# Altium PCB NexieTube rev.2.PcbDoc
Units mm, origin at the board's own origin, x right, y up, seen from the top; angles counter-clockwise.
Board outline 80 x 46 mm, 3 copper layers (Top Layer, Signal Layer 1, Bottom Layer), stack 0.488 mm thick; 29 components, 73 nets, 196 pads, 20 vias.
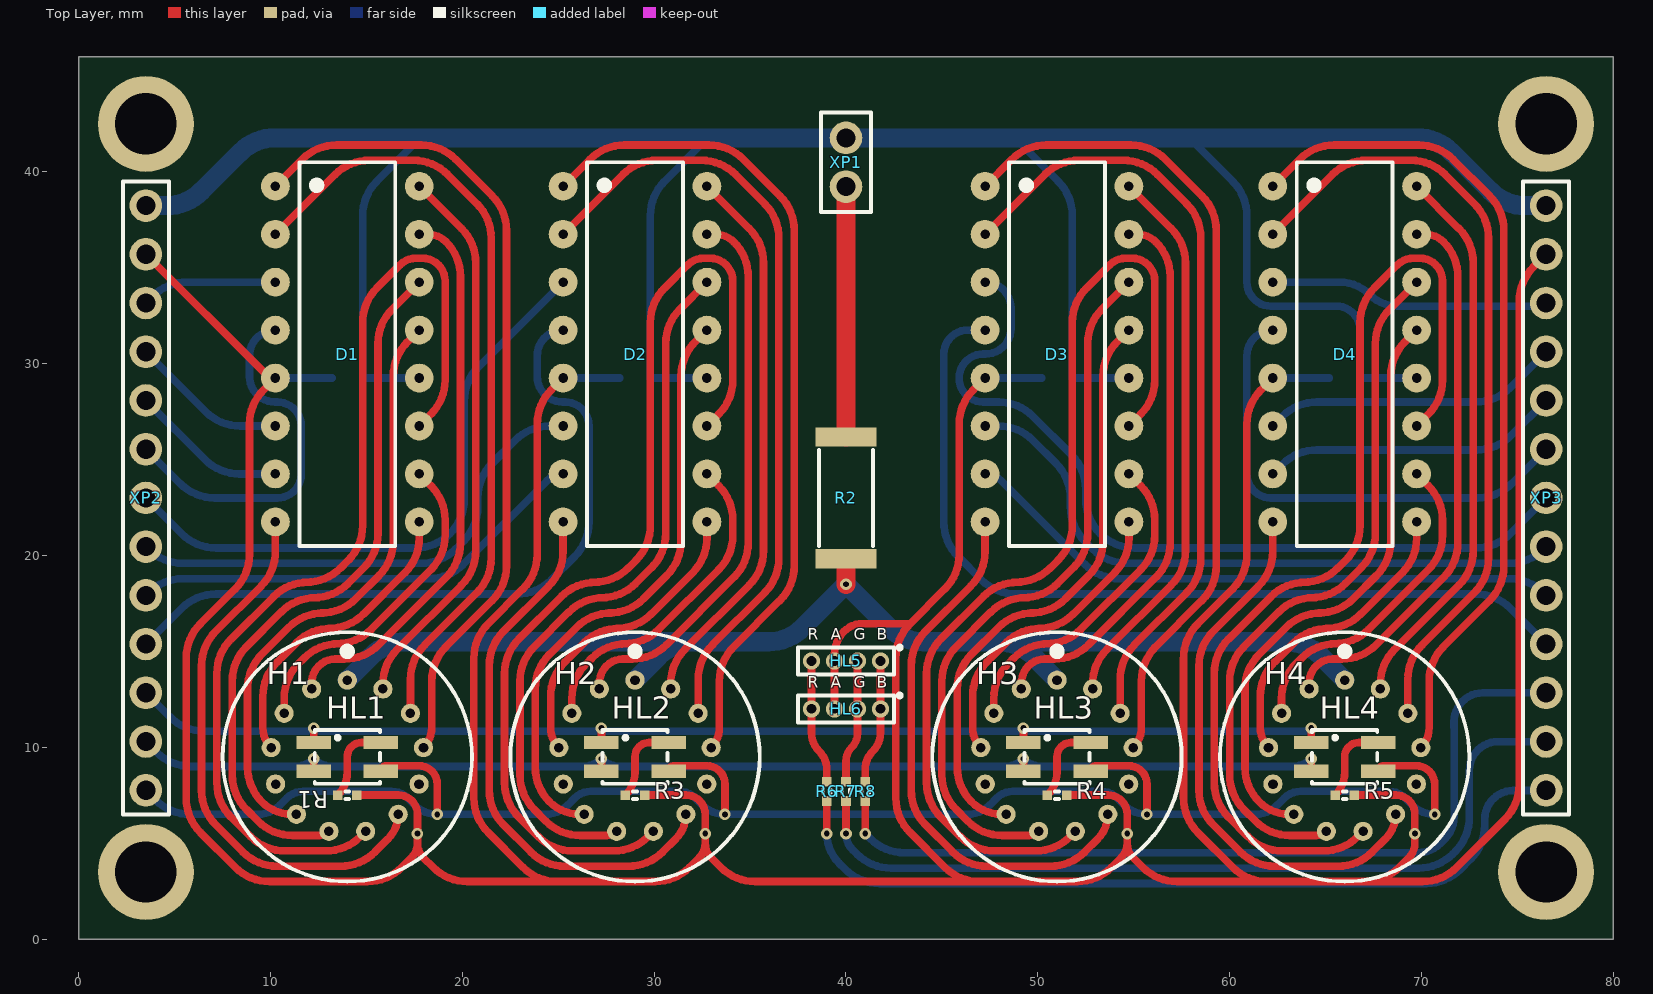
[diagram p0: Top Layer view]
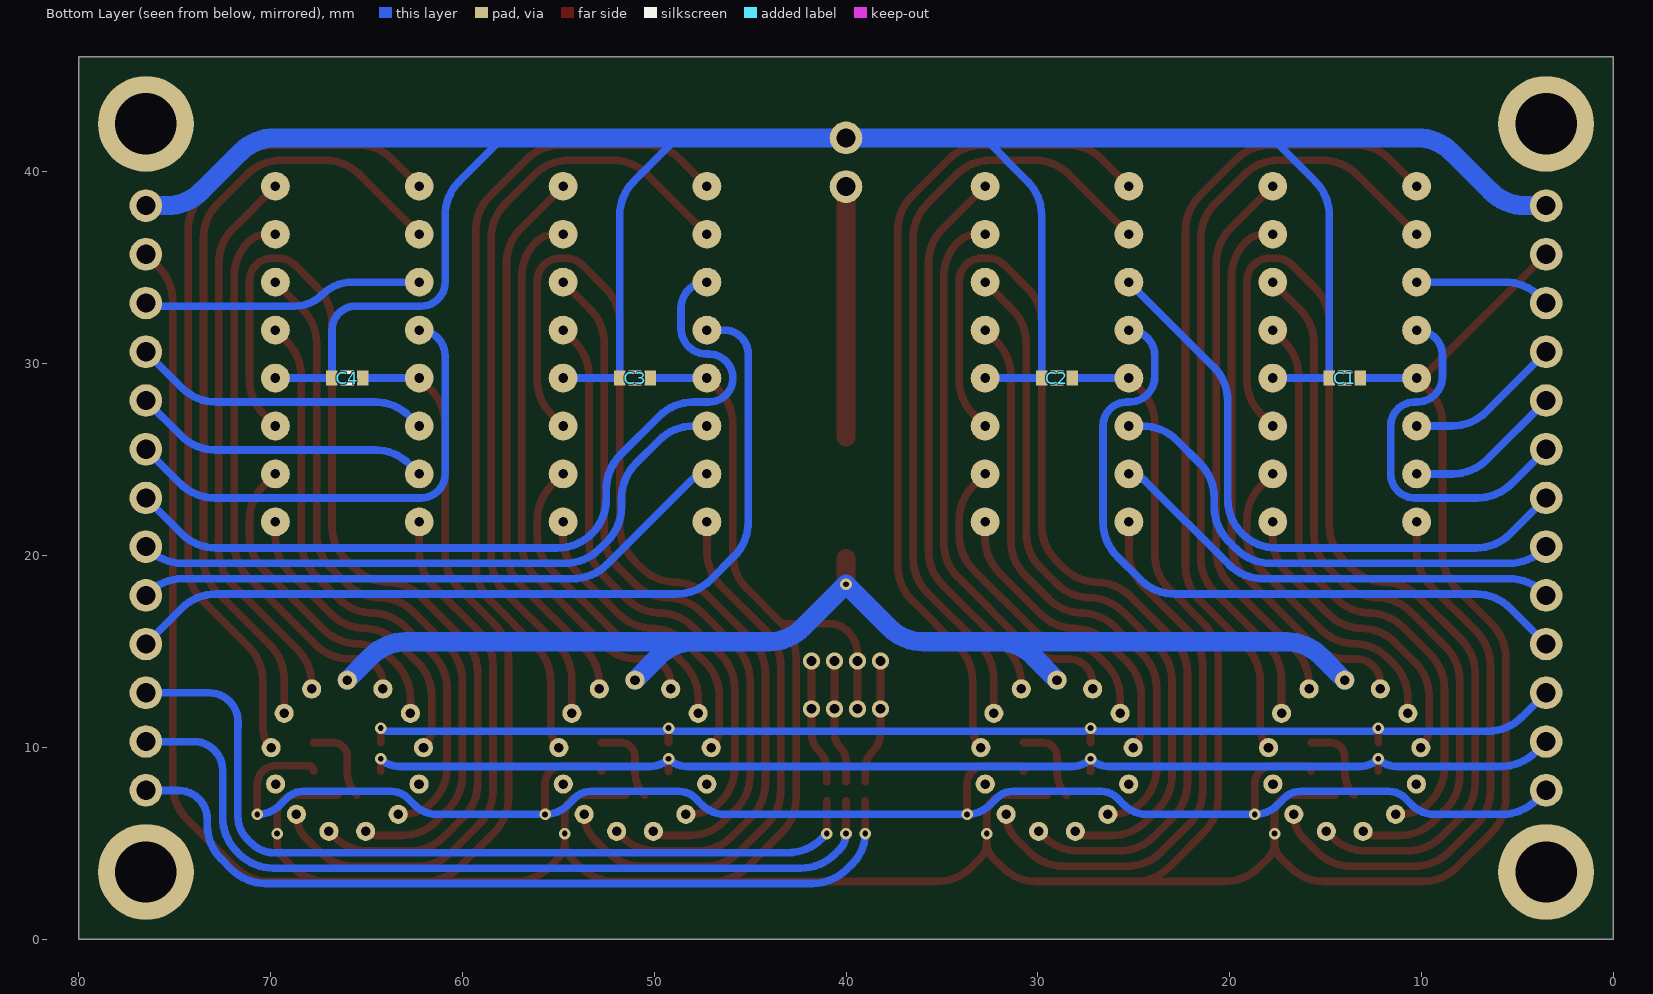
[diagram p1: Bottom Layer view, seen from below]

## Layer stack, top to bottom
Top Solder: solder mask 0.0102, Solder Resist, Dk 3.5
Top Layer: signal copper 0.0356
Dielectric 1: core 0.254, FR-4, Dk 4.2
Signal Layer 1: signal copper 0.036
Dielectric 2: prepreg 0.127, Dk 4.2
Bottom Layer: signal copper 0.0356
Bottom Solder: solder mask 0.0102, Solder Resist, Dk 3.5

## Board outline
0,0 80,0 80,46 0,46

## Design rules (kind name [scope] priority, off if disabled: settings)
Clearance [All] p1: gap=0.15 ignorepadtopadclearanceinfootprint=FALSE
ComponentClearance [All] p1: gap=0 collisioncheckmode=3 verticalgap=0 showdistances=FALSE
Height [All] p1: minheight=0 maxheight=100 prefheight=20
PolygonConnect [All] p1: connectstyle=Relief reliefconductorwidth=0.254 reliefentries=4 polygonreliefangle="90 Angle" airgapwidth=0.254
RoutingCorners [All] p1: cornerstyle=Round minsetback=1 maxsetback=1
RoutingVias [All] p1: holewidth=0.3 width=0.6 viastyle="Through Hole" minholewidth=0.3 minwidth=0.6 maxholewidth=3.2 maxwidth=5
SolderMaskExpansion [All] p1: expansion=0.1
Width [All] p1: maxlimit=1.5 minlimit=0.15 preferedwidth=0.2
27 further rules are at their usual default settings.

## Components (designator, comment, footprint, x,y, rotation, side; value= is the part's Value field where it differs from the comment)
C1 "Capacitors" SMD_0603 14,29.25 r180 bottom value="0.1 мк"
C2 "Capacitors" SMD_0603 29,29.25 r180 bottom value="0.1 мк"
C3 "Capacitors" SMD_0603 51,29.25 r180 bottom value="0.1 мк"
C4 "Capacitors" SMD_0603 66,29.25 r180 bottom value="0.1 мк"
D1 "К155ИД1" К155ИД1 14,30.5 r270 top locked
D2 "К155ИД1" К155ИД1 29,30.5 r270 top locked
D3 "К155ИД1" К155ИД1 51,30.5 r270 top locked
D4 "К155ИД1" К155ИД1 66,30.5 r270 top locked
H1 "IN-16" IN_16_tube 14,9.5 r0 top locked
H2 "IN-16" IN_16_tube 29,9.5 r0 top locked
H3 "IN-16" IN_16_tube 51,9.5 r0 top locked
H4 "IN-16" IN_16_tube 66,9.5 r0 top locked
HL1 "TO-3228BC-MRPBFGF" TO-3228BC-MRPBFGF 14,9.5 r0 top locked
HL2 "TO-3228BC-MRPBFGF" TO-3228BC-MRPBFGF 29,9.5 r0 top locked
HL3 "TO-3228BC-MRPBFGF" TO-3228BC-MRPBFGF 51,9.5 r0 top locked
HL4 "TO-3228BC-MRPBFGF" TO-3228BC-MRPBFGF 66,9.5 r0 top locked
HL5 "BL-L515RGBC" BL-L515RGBC 40,14.5 r0 top
HL6 "BL-L515RGBC" BL-L515RGBC 40,12 r0 top
R1 "Resistor" SMD_0402 14,7.5 r180 top value=510
R2 "Resistor" SMD_2512 40,23 r270 top value="15 к"
R3 "Resistor" SMD_0402 29,7.5 r180 top value=510
R4 "Resistor" SMD_0402 51,7.5 r180 top value=510
R5 "Resistor" SMD_0402 66,7.5 r180 top value=510
R6 "Resistor" SMD_0402 39,7.7 r270 top value=510
R7 "Resistor" SMD_0402 40,7.7 r270 top value=510
R8 "Resistor" SMD_0402 41,7.7 r270 top value=510
XP1 "DS1021-1*2SF11" DS1021-1*2 40,40.5 r90 top
XP2 "DS1021-1*13SF11" DS1021-1*13 3.5,23 r270 top
XP3 "DS1021-1*13SF11" DS1021-1*13 76.5,23 r270 top

## Footprints (in the part's own frame and the unit in brackets; to place one, negate y for a bottom-side part, rotate by r counter-clockwise, add the part's x,y. Pads: shape width x height; smd on the part's side, far side on the other; paste and mask are expansions set on the pad)
BL-L515RGBC [mm]
  round 0.9 hole 0.5: 1(1.8,0) 2(0.6,0) 3(-0.6,0) 4(-1.8,0)
  silkscreen extent -2.5,-0.7 2.9,0.8, body extent -2.95,-2.95 2.95,2.95, height 12.6
DS1021-1*2 [mm]
  round 1.7 hole 1: 1(-1.27,0) 2(1.27,0)
  silkscreen extent -2.6,-1.3 2.6,1.3, body extent -2.54,-1.27 2.54,1.27, height 8.44
DS1021-1*13 [mm]
  round 1.7 hole 1: 1(-15.24,0) 2(-12.7,0) 3(-10.16,0) 4(-7.62,0) 5(-5.08,0) 6(-2.54,0) 7(0,0) 8(2.54,0) 9(5.08,0) 10(7.62,0) 11(10.16,0) 12(12.7,0) 13(15.24,0)
  silkscreen extent -16.5,-1.2 16.5,1.2, body extent -16.51,-1.27 16.51,1.27, height 8.44
IN_16_tube [mm]
  round 1 hole 0.5: 1(0,4) 2(-1.859,3.542) 3(-3.292,2.272) 4(-3.971,0.482) 5(-3.74,-1.418) 6(-2.652,-2.994) 7(-0.957,-3.884) 8(0.957,-3.884) 9(2.652,-2.994) 10(3.74,-1.418) 11(3.971,0.482) 12(3.292,2.272) 13(1.859,3.542)
  Top Layer region: 0,0 0,0 0,0 0,0
  silkscreen extent -6.5,-6.5 6.5,6.5, body extent -6.75,-6.75 6.75,6.75, height 43
SMD_0402 [mm]
  rect 0.5x0.5 smd: 1(-0.5,0) 2(0.5,0)
  silkscreen extent -0.1,-0.2 0.1,0.2, body extent -0.5,-0.25 0.5,0.25, height 0.35
SMD_0603 [mm]
  rect 0.6x0.8 smd: 1(-0.8,0) 2(0.8,0)
  silkscreen extent -0.3,-0.3 0.3,0.3, body extent -0.8,-0.4 0.8,0.4, height 0.6
SMD_2512 [mm]
  rect 1x3.2 smd: 1(-3.175,0) 2(3.175,0)
  silkscreen extent -2.5,-1.4 2.5,1.4, body extent -3.17,-1.6 3.18,1.6, height 0.55
TO-3228BC-MRPBFGF [mm]
  rect 1.8x0.7 smd: 1(-1.75,0.75) 2(-1.75,-0.75) 3(1.75,-0.75) 4(1.75,0.75)
  silkscreen extent -1.7,-1.4 1.7,1.4, body extent -1.75,-1.4 1.75,1.4, height 2.05
К155ИД1 [mm]
  round 1.5 hole 0.5: 1(-8.75,-3.75) 2(-6.25,-3.75) 3(-3.75,-3.75) 4(-1.25,-3.75) 5(1.25,-3.75) 6(3.75,-3.75) 7(6.25,-3.75) 8(8.75,-3.75) 9(8.75,3.75) 10(6.25,3.75) 11(3.75,3.75) 12(1.25,3.75) 13(-1.25,3.75) 14(-3.75,3.75) 15(-6.25,3.75) 16(-8.75,3.75)
  silkscreen extent -10,-2.5 10,2.5, body extent -10.75,-3.9 10.75,3.9, height 5.31

## Part data
H1 H2 H3 H4: Manufacturer=СССР, ESKD=ИН-16
HL1 HL2 HL3 HL4: Manufacturer="Taiwan Oasis Technology Co., Ltd", Class=LED, Creator=FedorenkoS, ESKD=TO-3228BC-MRPBFGF
HL5 HL6: Manufacturer=Betlux, Class=LED, Creator=FedorenkoS, ESKD=BL-L515RGBC
XP2 XP3: "PLS", ЕСКД=DS1021-1*13SF11, Производитель=Connfly, Разработчик библиотеки="Федоренко С.С."
C1 C2 C3 C4 R1 R2 R3 R4 R5 R6 R7 R8: Creator=PavelR
XP1: ЕСКД=DS1021-1*2SF11, Производитель=Connfly, Разработчик библиотеки="Федоренко С.С."

## Free pads (board coordinates)
  round 5 hole 3.2: 0(3.5,3.5) 0(3.5,42.5) 0(76.5,3.5) 0(76.5,42.5)

## Via types
v1: diameter 0.6, hole 0.3, Top Layer to Bottom Layer, tented both sides, 20 vias

## Nets (pads, with @x,y where several pads share a name; then routed paths per layer and width w, separated by ;. In a path a pad name is that pad's centre, name@x,y a point inside that pad or via, vN(x,y) a via of type N, cw(c..) or ccw(c..) an arc to the next point about the centre after c; other vN are vias at no path point)
+5: C1.2 C2.2 C3.2 C4.2 D1.5 D2.5 D3.5 D4.5 HL5.3 HL6.3 R1.1 R3.1 R4.1 R5.1 XP2.2 XP3.2 | length 275
  Top Layer w0.4: XP2.2 9.738,29.462 ccw(c10.25,29.974) D1.5 9.644,28.644 ccw(c11.44,26.848) 8.9,26.848 8.9,20.052 cw(c6.36,20.052) 8.156,18.256 6.344,16.444 ccw(c8.14,14.648) 5.6,14.648 5.6,7.352 ccw(c8.14,7.352) 6.344,5.556 8.156,3.744 ccw(c9.952,5.54) 9.952,3 15.048,3 ccw(c15.048,5.54) 16.844,3.744 17.346,4.246 ccw(c16.593,5) 17.658,5 ; R1.1 14.5,7.512 16.652,7.512 cw(c16.652,6.506) 17.658,6.506 17.658,5 ; 24.952,3 cw(c24.952,5.54) 23.156,3.744 21.344,5.556 cw(c23.14,7.352) 20.6,7.352 20.6,14.648 cw(c23.14,14.648) 21.344,16.444 23.156,18.256 ccw(c21.36,20.052) 23.9,20.052 23.9,26.848 cw(c26.44,26.848) 24.644,28.644 D2.5 ; R3.1 29.5,7.512 31.652,7.512 cw(c31.652,6.506) 32.658,6.506 32.658,5 ; HL6.3 HL5.3 39.4,14.837 cw(c41.107,14.837) 39.9,16.044 cw(c40.866,15.078) 40.866,16.444 43.344,16.444 ; 46.952,3 cw(c46.952,5.54) 45.156,3.744 43.344,5.556 cw(c45.14,7.352) 42.6,7.352 42.6,14.648 cw(c45.14,14.648) 43.344,16.444 ; D3.5 46.644,28.644 ccw(c48.44,26.848) 45.9,26.848 45.9,20.052 cw(c43.36,20.052) 45.156,18.256 43.344,16.444 ; R4.1 51.5,7.512 53.652,7.512 cw(c53.652,6.506) 54.658,6.506 54.658,5 ; D4.5 61.644,28.644 ccw(c63.44,26.848) 60.9,26.848 60.9,20.052 cw(c58.36,20.052) 60.156,18.256 58.344,16.444 ccw(c60.14,14.648) 57.6,14.648 57.6,7.352 ccw(c60.14,7.352) 58.344,5.556 60.156,3.744 ccw(c61.952,5.54) 61.952,3 ; R5.1 66.5,7.512 68.652,7.512 cw(c68.652,6.506) 69.658,6.506 69.658,5 cw(c68.593,5) 69.346,4.246 68.844,3.744 cw(c67.048,5.54) 67.048,3 ; XP3.2 75.844,35.044 ccw(c77.64,33.248) 75.1,33.248 75.1,8.052 cw(c72.56,8.052) 74.356,6.256 71.844,3.744 cw(c70.048,5.54) 70.048,3 67.048,3 ; 17.658,5 ccw(c18.724,5) 17.971,4.246 18.473,3.744 ccw(c20.269,5.54) 20.269,3 30.048,3 ccw(c30.048,5.54) 31.844,3.744 32.346,4.246 ccw(c31.593,5) 32.658,5 ; 32.658,5 ccw(c33.724,5) 32.971,4.246 33.473,3.744 ccw(c35.269,5.54) 35.269,3 52.048,3 ccw(c52.048,5.54) 53.844,3.744 54.346,4.246 ccw(c53.593,5) 54.658,5 ; 54.658,5 ccw(c55.724,5) 54.971,4.246 55.473,3.744 ccw(c57.269,5.54) 57.269,3 61.952,3 ; 61.952,3 67.048,3
  Bottom Layer w0.4: D1.5 C1.2 ; D2.5 C2.2 ; D3.5 C3.2 ; D4.5 C4.2
  other v1: 17.658,5.5 32.658,5.5 54.658,5.5 69.658,5.5
+180: R2.1 XP1.1 | length 13.1
  Top Layer w1: R2.1 XP1.1
GND: C1.1 C2.1 C3.1 C4.1 D1.12 D2.12 D3.12 D4.12 XP1.2 XP2.1 XP3.1 | length 146.7
  Bottom Layer w0.4: D1.12 C1.1 14.8,37.718 cw(c17.34,37.718) 15.544,39.514 17.8,41.77 ; D2.12 C2.1 29.8,37.718 cw(c32.34,37.718) 30.544,39.514 32.8,41.77 ; 48.8,41.77 51.056,39.514 cw(c49.26,37.718) 51.8,37.718 C3.1 D3.12 ; 57.9,41.77 60.156,39.514 cw(c58.36,37.718) 60.9,37.718 60.9,34.25 ccw(c62.15,34.25) 62.15,33 65.55,33 cw(c65.55,31.75) 66.8,31.75 C4.1 D4.12
  Bottom Layer w1: XP2.1 4.588,38.24 ccw(c4.588,40.78) 6.384,38.984 8.426,41.026 cw(c10.222,39.23) 10.222,41.77 XP1.2 48.8,41.77 69.778,41.77 cw(c69.778,39.23) 71.574,41.026 73.616,38.984 ccw(c75.412,40.78) 75.412,38.24 XP3.1
LED_B: HL1.3 HL2.3 HL3.3 HL4.3 XP2.13 | length 91.5
  Top Layer w0.4: HL1.3 cw(c16.032,8.75) 16.032,9.032 17.74,9.032 cw(c17.74,8.082) 18.69,8.082 v1(18.69,6.5) ; HL2.3 cw(c31.032,8.75) 31.032,9.032 32.74,9.032 cw(c32.74,8.082) 33.69,8.082 v1(33.69,6.5) ; HL3.3 cw(c53.032,8.75) 53.032,9.032 54.74,9.032 cw(c54.74,8.082) 55.69,8.082 v1(55.69,6.5) ; HL4.3 cw(c68.032,8.75) 68.032,9.032 69.74,9.032 cw(c69.74,8.082) 70.69,8.082 v1(70.69,6.5)
  Bottom Layer w0.4: XP2.13 4.016,7.244 ccw(c5.812,9.04) 5.812,6.5 9.31,6.5 ccw(c9.31,8.166) 10.488,6.988 10.846,7.346 cw(c11.7,6.493) 11.7,7.7 16.3,7.7 cw(c16.3,6.493) 17.154,7.346 17.512,6.988 ccw(c18.69,8.166) v1(18.69,6.5) 24.31,6.5 ccw(c24.31,8.166) 25.488,6.988 25.846,7.346 cw(c26.7,6.493) 26.7,7.7 31.3,7.7 cw(c31.3,6.493) 32.154,7.346 32.512,6.988 ccw(c33.69,8.166) v1(33.69,6.5) 46.31,6.5 ccw(c46.31,8.166) 47.488,6.988 47.846,7.346 cw(c48.7,6.493) 48.7,7.7 53.3,7.7 cw(c53.3,6.493) 54.154,7.346 54.512,6.988 ccw(c55.69,8.166) v1(55.69,6.5) 61.31,6.5 ccw(c61.31,8.166) 62.488,6.988 62.846,7.346 cw(c63.7,6.493) 63.7,7.7 68.3,7.7 cw(c68.3,6.493) 69.154,7.346 69.512,6.988 ccw(c70.69,8.166) v1(70.69,6.5)
LED_G: HL1.2 HL2.2 HL3.2 HL4.2 XP2.12 | length 64.5
  Top Layer w0.4: HL1.2 v1(12.25,9.4) ; HL2.2 v1(27.25,9.4) ; HL3.2 v1(49.25,9.4) ; HL4.2 v1(64.25,9.4)
  Bottom Layer w0.4: XP2.12 4.056,9.744 ccw(c5.852,11.54) 5.852,9 11.284,9 ccw(c11.284,10.366) v1(12.25,9.4) ccw(c13.216,10.366) 13.216,9 26.284,9 ccw(c26.284,10.366) v1(27.25,9.4) ccw(c28.216,10.366) 28.216,9 48.284,9 ccw(c48.284,10.366) v1(49.25,9.4) ccw(c50.216,10.366) 50.216,9 63.284,9 ccw(c63.284,10.366) v1(64.25,9.4)
LED_P_B: R8.2 XP3.11 | length 44.4
  Top Layer w0.4: v1(41,5.5) R8.2
  Bottom Layer w0.4: v1(41,5.5) 41.256,5.244 ccw(c43.052,7.04) 43.052,4.5 69.8,4.5 ccw(c69.8,6.207) 71.007,5 71.207,5.2 ccw(c70,6.407) 71.707,6.407 71.707,11.04 71.7,11.04 71.7,11.336 cw(c73.2,11.336) 73.2,12.836 76.5,12.836 XP3.11
LED_P_G: R7.2 XP3.12 | length 43.9
  Top Layer w0.4: v1(40,5.5) R7.2
  Bottom Layer w0.4: v1(40,5.5) ccw(c41.207,5.5) 40.353,4.647 40.556,4.444 ccw(c42.352,6.24) 42.352,3.7 69.848,3.7 ccw(c69.848,6.24) 71.644,4.444 71.756,4.556 ccw(c69.96,6.352) 72.5,6.352 72.5,8.5 72.5,8.796 cw(c74,8.796) 74,10.296 76.5,10.296 XP3.12
LED_P_R: R6.2 XP3.13 | length 43.4
  Top Layer w0.4: v1(39,5.5) R6.2
  Bottom Layer w0.4: v1(39,5.5) ccw(c41.173,5.5) 39.636,3.964 39.956,3.644 ccw(c41.752,5.44) 41.752,2.9 70.248,2.9 ccw(c70.248,5.44) 72.044,3.644 72.556,4.156 ccw(c70.76,5.952) 73.3,5.952 73.3,6.248 cw(c74.8,6.248) 74.8,7.748 76.5,7.748 XP3.13
LED_R: HL1.1 HL2.1 HL3.1 HL4.1 XP2.11 | length 64.8
  Top Layer w0.4: HL1.1 v1(12.25,11) ; HL2.1 v1(27.25,11) ; HL3.1 v1(49.25,11) ; HL4.1 v1(64.25,11)
  Bottom Layer w0.4: XP2.11 4.764,11.576 ccw(c6.56,13.372) 6.56,10.832 11.845,10.832 ccw(c11.845,11.405) v1(12.25,11) ccw(c12.655,11.405) 12.655,10.832 26.845,10.832 ccw(c26.845,11.405) v1(27.25,11) ccw(c27.655,11.405) 27.655,10.832 48.845,10.832 ccw(c48.845,11.405) v1(49.25,11) ccw(c49.655,11.405) 49.655,10.832 63.845,10.832 ccw(c63.845,11.405) v1(64.25,11)
NetD1_1: D1.1 H1.11 | length 43.6
  Top Layer w0.4: D1.1 11.656,40.656 cw(c13.452,38.86) 13.452,41.4 17.848,41.4 cw(c17.848,38.86) 19.644,40.656 21.556,38.744 cw(c19.76,36.948) 22.3,36.948 22.3,19.452 cw(c19.76,19.452) 21.556,17.656 19.144,15.244 ccw(c20.94,13.448) 18.4,13.448 18.4,11.018 cw(c16.935,11.018) H1.11
NetD1_2: D1.2 H1.12 | length 41.1
  Top Layer w0.4: D1.2 13.356,39.856 cw(c15.152,38.06) 15.152,40.6 17.448,40.6 cw(c17.448,38.06) 19.244,39.856 20.756,38.344 cw(c18.96,36.548) 21.5,36.548 21.5,19.852 cw(c18.96,19.852) 20.756,18.056 18.036,15.336 ccw(c19.832,13.54) 17.292,13.54 H1.12
NetD1_8: D1.8 H1.9 | length 29
  Top Layer w0.4: D1.8 10.25,20.202 cw(c7.71,20.202) 9.506,18.406 7.144,16.044 ccw(c8.94,14.248) 6.4,14.248 6.4,7.752 ccw(c8.94,7.752) 7.144,5.956 8.556,4.544 ccw(c10.352,6.34) 10.352,3.8 13.648,3.8 ccw(c13.648,6.34) 15.444,4.544 16.12,5.22 ccw(c14.833,6.506) H1.9
NetD1_9: D1.9 H1.4 | length 16.1
  Top Layer w0.4: H1.4 cw(c11.065,11.018) 9.6,11.018 9.6,12.648 cw(c12.14,12.648) 10.344,14.444 11.356,15.456 cw(c13.152,13.66) 13.152,16.2 ; 13.048,16.2 ccw(c13.048,18.74) 14.844,16.944 17.006,19.106 ccw(c15.21,20.902) 17.75,20.902 D1.9
NetD1_10: D1.10 H1.3 | length 17.2
  Top Layer w0.4: H1.3 10.708,12.556 cw(c13.248,12.556) 11.452,14.352 11.756,14.656 cw(c13.552,12.86) 13.552,15.4 ; 13.448,15.4 ccw(c13.448,17.94) 15.244,16.144 18.356,19.256 ccw(c16.56,21.052) 19.1,21.052 19.1,21.848 ccw(c16.56,21.848) 18.356,23.644 D1.10
NetD1_11: D1.11 H1.8 | length 52.8
  Top Layer w0.4: 11.848,18.6 ccw(c11.848,21.14) 13.644,19.344 14.056,19.756 ccw(c12.26,21.552) 14.8,21.552 14.8,32.148 cw(c17.34,32.148) 15.544,33.944 16.746,35.146 cw(c17.6,34.293) 17.6,35.5 17.9,35.5 cw(c17.9,34.293) 18.754,35.146 ; 11.952,18.6 ccw(c11.952,16.06) 10.156,17.856 7.944,15.644 ccw(c9.74,13.848) 7.2,13.848 7.2,8.152 ccw(c9.74,8.152) 7.944,6.356 8.956,5.344 ccw(c10.752,7.14) 10.752,4.6 12.889,4.6 ccw(c12.889,7.14) 14.685,5.344 H1.8 ; D1.11 18.356,27.356 ccw(c16.56,29.152) 19.1,29.152 19.1,34.3 ccw(c17.893,34.3) 18.746,35.154
NetD1_13: D1.13 H1.6 | length 31.2
  Top Layer w0.4: H1.6 11.113,6.506 cw(c11.113,8.726) 9.544,7.156 cw(c11.34,8.952) 8.8,8.952 8.8,13.048 cw(c11.34,13.048) 9.544,14.844 10.956,16.256 cw(c12.752,14.46) 12.752,17 ; 12.648,17 ccw(c12.648,19.54) 14.444,17.744 15.656,18.956 ccw(c13.86,20.752) 16.4,20.752 16.4,29.348 cw(c18.94,29.348) 17.144,31.144 D1.13
NetD1_14: D1.14 H1.7 | length 37.3
  Top Layer w0.4: 12.248,17.8 ccw(c12.248,20.34) 14.044,18.544 14.856,19.356 ccw(c13.06,21.152) 15.6,21.152 15.6,31.048 cw(c18.14,31.048) 16.344,32.844 D1.14 ; 12.352,17.8 ccw(c12.352,15.26) 10.556,17.056 8.744,15.244 ccw(c10.54,13.448) 8,13.448 8,8.552 ccw(c10.54,8.552) 8.744,6.756 9.356,6.144 ccw(c11.152,7.94) 11.152,5.4 12.521,5.4 ccw(c12.521,6.138) H1.7
NetD1_15: D1.15 H1.2 | length 29.1
  Top Layer w0.4: H1.2 12.141,13.33 cw(c13.437,13.33) 12.521,14.246 cw(c13.374,13.393) 13.374,14.6 13.848,14.6 ccw(c13.848,17.14) 15.644,15.344 19.156,18.856 ccw(c17.36,20.652) 19.9,20.652 19.9,34.548 ccw(c17.36,34.548) 19.156,36.344 ccw(c18.176,35.364) 18.176,36.75 D1.15
NetD1_16: D1.16 H1.13 | length 28.8
  Top Layer w0.4: H1.13@15.859,13.307 cw(c18.399,13.307) 16.603,15.103 19.956,18.456 ccw(c18.16,20.252) 20.7,20.252 20.7,35.248 ccw(c18.16,35.248) 19.956,37.044 D1.16
NetD2_1: D2.1 H2.11 | length 43.6
  Top Layer w0.4: D2.1 26.656,40.656 cw(c28.452,38.86) 28.452,41.4 32.848,41.4 cw(c32.848,38.86) 34.644,40.656 36.556,38.744 cw(c34.76,36.948) 37.3,36.948 37.3,19.452 cw(c34.76,19.452) 36.556,17.656 34.144,15.244 ccw(c35.94,13.448) 33.4,13.448 33.4,11.018 cw(c31.935,11.018) H2.11
NetD2_2: D2.2 H2.12 | length 41.1
  Top Layer w0.4: D2.2 28.356,39.856 cw(c30.152,38.06) 30.152,40.6 32.448,40.6 cw(c32.448,38.06) 34.244,39.856 35.756,38.344 cw(c33.96,36.548) 36.5,36.548 36.5,19.852 cw(c33.96,19.852) 35.756,18.056 33.036,15.336 ccw(c34.832,13.54) 32.292,13.54 H2.12
NetD2_8: D2.8 H2.9 | length 29
  Top Layer w0.4: D2.8 25.25,20.202 cw(c22.71,20.202) 24.506,18.406 22.144,16.044 ccw(c23.94,14.248) 21.4,14.248 21.4,7.752 ccw(c23.94,7.752) 22.144,5.956 23.556,4.544 ccw(c25.352,6.34) 25.352,3.8 28.648,3.8 ccw(c28.648,6.34) 30.444,4.544 31.12,5.22 ccw(c29.833,6.506) H2.9
NetD2_9: D2.9 H2.4 | length 16.1
  Top Layer w0.4: H2.4 cw(c26.065,11.018) 24.6,11.018 24.6,12.648 cw(c27.14,12.648) 25.344,14.444 26.356,15.456 cw(c28.152,13.66) 28.152,16.2 ; 28.048,16.2 ccw(c28.048,18.74) 29.844,16.944 32.006,19.106 ccw(c30.21,20.902) 32.75,20.902 D2.9
NetD2_10: D2.10 H2.3 | length 17.2
  Top Layer w0.4: H2.3 25.708,12.556 cw(c28.248,12.556) 26.452,14.352 26.756,14.656 cw(c28.552,12.86) 28.552,15.4 ; 28.448,15.4 ccw(c28.448,17.94) 30.244,16.144 33.356,19.256 ccw(c31.56,21.052) 34.1,21.052 34.1,21.848 ccw(c31.56,21.848) 33.356,23.644 D2.10
NetD2_11: D2.11 H2.8 | length 52.8
  Top Layer w0.4: 26.848,18.6 ccw(c26.848,21.14) 28.644,19.344 29.056,19.756 ccw(c27.26,21.552) 29.8,21.552 29.8,32.148 cw(c32.34,32.148) 30.544,33.944 31.746,35.146 cw(c32.6,34.293) 32.6,35.5 32.9,35.5 cw(c32.9,34.293) 33.754,35.146 ; 26.952,18.6 ccw(c26.952,16.06) 25.156,17.856 22.944,15.644 ccw(c24.74,13.848) 22.2,13.848 22.2,8.152 ccw(c24.74,8.152) 22.944,6.356 23.956,5.344 ccw(c25.752,7.14) 25.752,4.6 27.889,4.6 ccw(c27.889,7.14) 29.685,5.344 H2.8 ; D2.11 33.356,27.356 ccw(c31.56,29.152) 34.1,29.152 34.1,34.3 ccw(c32.893,34.3) 33.746,35.154
NetD2_13: D2.13 H2.6 | length 31.2
  Top Layer w0.4: H2.6 26.113,6.506 cw(c26.113,8.726) 24.544,7.156 cw(c26.34,8.952) 23.8,8.952 23.8,13.048 cw(c26.34,13.048) 24.544,14.844 25.956,16.256 cw(c27.752,14.46) 27.752,17 ; 27.648,17 ccw(c27.648,19.54) 29.444,17.744 30.656,18.956 ccw(c28.86,20.752) 31.4,20.752 31.4,29.348 cw(c33.94,29.348) 32.144,31.144 D2.13
NetD2_14: D2.14 H2.7 | length 37.3
  Top Layer w0.4: 27.248,17.8 ccw(c27.248,20.34) 29.044,18.544 29.856,19.356 ccw(c28.06,21.152) 30.6,21.152 30.6,31.048 cw(c33.14,31.048) 31.344,32.844 D2.14 ; 27.352,17.8 ccw(c27.352,15.26) 25.556,17.056 23.744,15.244 ccw(c25.54,13.448) 23,13.448 23,8.552 ccw(c25.54,8.552) 23.744,6.756 24.356,6.144 ccw(c26.152,7.94) 26.152,5.4 27.521,5.4 ccw(c27.521,6.138) H2.7
NetD2_15: D2.15 H2.2 | length 29.1
  Top Layer w0.4: H2.2 27.141,13.33 cw(c28.437,13.33) 27.521,14.246 cw(c28.374,13.393) 28.374,14.6 28.848,14.6 ccw(c28.848,17.14) 30.644,15.344 34.156,18.856 ccw(c32.36,20.652) 34.9,20.652 34.9,34.548 ccw(c32.36,34.548) 34.156,36.344 ccw(c33.176,35.364) 33.176,36.75 D2.15
NetD2_16: D2.16 H2.13 | length 28.8
  Top Layer w0.4: H2.13@30.859,13.307 cw(c33.399,13.307) 31.603,15.103 34.956,18.456 ccw(c33.16,20.252) 35.7,20.252 35.7,35.248 ccw(c33.16,35.248) 34.956,37.044 D2.16
NetD3_1: D3.1 H3.11 | length 43.6
  Top Layer w0.4: D3.1 48.656,40.656 cw(c50.452,38.86) 50.452,41.4 54.848,41.4 cw(c54.848,38.86) 56.644,40.656 58.556,38.744 cw(c56.76,36.948) 59.3,36.948 59.3,19.452 cw(c56.76,19.452) 58.556,17.656 56.144,15.244 ccw(c57.94,13.448) 55.4,13.448 55.4,11.018 cw(c53.935,11.018) H3.11
NetD3_2: D3.2 H3.12 | length 41.1
  Top Layer w0.4: D3.2 50.356,39.856 cw(c52.152,38.06) 52.152,40.6 54.448,40.6 cw(c54.448,38.06) 56.244,39.856 57.756,38.344 cw(c55.96,36.548) 58.5,36.548 58.5,19.852 cw(c55.96,19.852) 57.756,18.056 55.036,15.336 ccw(c56.832,13.54) 54.292,13.54 H3.12
NetD3_8: D3.8 H3.9 | length 29
  Top Layer w0.4: D3.8 47.25,20.202 cw(c44.71,20.202) 46.506,18.406 44.144,16.044 ccw(c45.94,14.248) 43.4,14.248 43.4,7.752 ccw(c45.94,7.752) 44.144,5.956 45.556,4.544 ccw(c47.352,6.34) 47.352,3.8 50.648,3.8 ccw(c50.648,6.34) 52.444,4.544 53.12,5.22 ccw(c51.833,6.506) H3.9
NetD3_9: D3.9 H3.4 | length 16.1
  Top Layer w0.4: H3.4 cw(c48.065,11.018) 46.6,11.018 46.6,12.648 cw(c49.14,12.648) 47.344,14.444 48.356,15.456 cw(c50.152,13.66) 50.152,16.2 ; 50.048,16.2 ccw(c50.048,18.74) 51.844,16.944 54.006,19.106 ccw(c52.21,20.902) 54.75,20.902 D3.9
NetD3_10: D3.10 H3.3 | length 17.2
  Top Layer w0.4: H3.3 47.708,12.556 cw(c50.248,12.556) 48.452,14.352 48.756,14.656 cw(c50.552,12.86) 50.552,15.4 ; 50.448,15.4 ccw(c50.448,17.94) 52.244,16.144 55.356,19.256 ccw(c53.56,21.052) 56.1,21.052 56.1,21.848 ccw(c53.56,21.848) 55.356,23.644 D3.10
NetD3_11: D3.11 H3.8 | length 52.8
  Top Layer w0.4: 48.848,18.6 ccw(c48.848,21.14) 50.644,19.344 51.056,19.756 ccw(c49.26,21.552) 51.8,21.552 51.8,32.148 cw(c54.34,32.148) 52.544,33.944 53.746,35.146 cw(c54.6,34.293) 54.6,35.5 54.9,35.5 cw(c54.9,34.293) 55.754,35.146 ; 48.952,18.6 ccw(c48.952,16.06) 47.156,17.856 44.944,15.644 ccw(c46.74,13.848) 44.2,13.848 44.2,8.152 ccw(c46.74,8.152) 44.944,6.356 45.956,5.344 ccw(c47.752,7.14) 47.752,4.6 49.889,4.6 ccw(c49.889,7.14) 51.685,5.344 H3.8 ; D3.11 55.356,27.356 ccw(c53.56,29.152) 56.1,29.152 56.1,34.3 ccw(c54.893,34.3) 55.746,35.154
NetD3_13: D3.13 H3.6 | length 31.2
  Top Layer w0.4: H3.6 48.113,6.506 cw(c48.113,8.726) 46.544,7.156 cw(c48.34,8.952) 45.8,8.952 45.8,13.048 cw(c48.34,13.048) 46.544,14.844 47.956,16.256 cw(c49.752,14.46) 49.752,17 ; 49.648,17 ccw(c49.648,19.54) 51.444,17.744 52.656,18.956 ccw(c50.86,20.752) 53.4,20.752 53.4,29.348 cw(c55.94,29.348) 54.144,31.144 D3.13
NetD3_14: D3.14 H3.7 | length 37.3
  Top Layer w0.4: 49.248,17.8 ccw(c49.248,20.34) 51.044,18.544 51.856,19.356 ccw(c50.06,21.152) 52.6,21.152 52.6,31.048 cw(c55.14,31.048) 53.344,32.844 D3.14 ; 49.352,17.8 ccw(c49.352,15.26) 47.556,17.056 45.744,15.244 ccw(c47.54,13.448) 45,13.448 45,8.552 ccw(c47.54,8.552) 45.744,6.756 46.356,6.144 ccw(c48.152,7.94) 48.152,5.4 49.521,5.4 ccw(c49.521,6.138) H3.7
NetD3_15: D3.15 H3.2 | length 29.1
  Top Layer w0.4: H3.2 49.141,13.33 cw(c50.437,13.33) 49.521,14.246 cw(c50.374,13.393) 50.374,14.6 50.848,14.6 ccw(c50.848,17.14) 52.644,15.344 56.156,18.856 ccw(c54.36,20.652) 56.9,20.652 56.9,34.548 ccw(c54.36,34.548) 56.156,36.344 ccw(c55.176,35.364) 55.176,36.75 D3.15
NetD3_16: D3.16 H3.13 | length 28.8
  Top Layer w0.4: H3.13@52.859,13.307 cw(c55.399,13.307) 53.603,15.103 56.956,18.456 ccw(c55.16,20.252) 57.7,20.252 57.7,35.248 ccw(c55.16,35.248) 56.956,37.044 D3.16
NetD4_1: D4.1 H4.11 | length 43.6
  Top Layer w0.4: D4.1 63.656,40.656 cw(c65.452,38.86) 65.452,41.4 69.848,41.4 cw(c69.848,38.86) 71.644,40.656 73.556,38.744 cw(c71.76,36.948) 74.3,36.948 74.3,19.452 cw(c71.76,19.452) 73.556,17.656 71.144,15.244 ccw(c72.94,13.448) 70.4,13.448 70.4,11.018 cw(c68.935,11.018) H4.11
NetD4_2: D4.2 H4.12 | length 41.1
  Top Layer w0.4: D4.2 65.356,39.856 cw(c67.152,38.06) 67.152,40.6 69.448,40.6 cw(c69.448,38.06) 71.244,39.856 72.756,38.344 cw(c70.96,36.548) 73.5,36.548 73.5,19.852 cw(c70.96,19.852) 72.756,18.056 70.036,15.336 ccw(c71.832,13.54) 69.292,13.54 H4.12
NetD4_8: D4.8 H4.9 | length 29
  Top Layer w0.4: D4.8 62.25,20.202 cw(c59.71,20.202) 61.506,18.406 59.144,16.044 ccw(c60.94,14.248) 58.4,14.248 58.4,7.752 ccw(c60.94,7.752) 59.144,5.956 60.556,4.544 ccw(c62.352,6.34) 62.352,3.8 65.648,3.8 ccw(c65.648,6.34) 67.444,4.544 68.12,5.22 ccw(c66.833,6.506) H4.9
NetD4_9: D4.9 H4.4 | length 16.1
  Top Layer w0.4: H4.4 cw(c63.065,11.018) 61.6,11.018 61.6,12.648 cw(c64.14,12.648) 62.344,14.444 63.356,15.456 cw(c65.152,13.66) 65.152,16.2 ; 65.048,16.2 ccw(c65.048,18.74) 66.844,16.944 69.006,19.106 ccw(c67.21,20.902) 69.75,20.902 D4.9
NetD4_10: D4.10 H4.3 | length 17.2
  Top Layer w0.4: H4.3 62.708,12.556 cw(c65.248,12.556) 63.452,14.352 63.756,14.656 cw(c65.552,12.86) 65.552,15.4 ; 65.448,15.4 ccw(c65.448,17.94) 67.244,16.144 70.356,19.256 ccw(c68.56,21.052) 71.1,21.052 71.1,21.848 ccw(c68.56,21.848) 70.356,23.644 D4.10
NetD4_11: D4.11 H4.8 | length 52.8
  Top Layer w0.4: 63.848,18.6 ccw(c63.848,21.14) 65.644,19.344 66.056,19.756 ccw(c64.26,21.552) 66.8,21.552 66.8,32.148 cw(c69.34,32.148) 67.544,33.944 68.746,35.146 cw(c69.6,34.293) 69.6,35.5 69.9,35.5 cw(c69.9,34.293) 70.754,35.146 ; 63.952,18.6 ccw(c63.952,16.06) 62.156,17.856 59.944,15.644 ccw(c61.74,13.848) 59.2,13.848 59.2,8.152 ccw(c61.74,8.152) 59.944,6.356 60.956,5.344 ccw(c62.752,7.14) 62.752,4.6 64.889,4.6 ccw(c64.889,7.14) 66.685,5.344 H4.8 ; D4.11 70.356,27.356 ccw(c68.56,29.152) 71.1,29.152 71.1,34.3 ccw(c69.893,34.3) 70.746,35.154
NetD4_13: D4.13 H4.6 | length 31.2
  Top Layer w0.4: H4.6 63.113,6.506 cw(c63.113,8.726) 61.544,7.156 cw(c63.34,8.952) 60.8,8.952 60.8,13.048 cw(c63.34,13.048) 61.544,14.844 62.956,16.256 cw(c64.752,14.46) 64.752,17 ; 64.648,17 ccw(c64.648,19.54) 66.444,17.744 67.656,18.956 ccw(c65.86,20.752) 68.4,20.752 68.4,29.348 cw(c70.94,29.348) 69.144,31.144 D4.13
NetD4_14: D4.14 H4.7 | length 37.3
  Top Layer w0.4: 64.248,17.8 ccw(c64.248,20.34) 66.044,18.544 66.856,19.356 ccw(c65.06,21.152) 67.6,21.152 67.6,31.048 cw(c70.14,31.048) 68.344,32.844 D4.14 ; 64.352,17.8 ccw(c64.352,15.26) 62.556,17.056 60.744,15.244 ccw(c62.54,13.448) 60,13.448 60,8.552 ccw(c62.54,8.552) 60.744,6.756 61.356,6.144 ccw(c63.152,7.94) 63.152,5.4 64.521,5.4 ccw(c64.521,6.138) H4.7
NetD4_15: D4.15 H4.2 | length 29.1
  Top Layer w0.4: H4.2 64.141,13.33 cw(c65.437,13.33) 64.521,14.246 cw(c65.374,13.393) 65.374,14.6 65.848,14.6 ccw(c65.848,17.14) 67.644,15.344 71.156,18.856 ccw(c69.36,20.652) 71.9,20.652 71.9,34.548 ccw(c69.36,34.548) 71.156,36.344 ccw(c70.176,35.364) 70.176,36.75 D4.15
NetD4_16: D4.16 H4.13 | length 28.8
  Top Layer w0.4: H4.13@67.859,13.307 cw(c70.399,13.307) 68.603,15.103 71.956,18.456 ccw(c70.16,20.252) 72.7,20.252 72.7,35.248 ccw(c70.16,35.248) 71.956,37.044 D4.16
NetH1_1: H1.1 H2.1 H3.1 H4.1 R2.2 | length 64.6
  Top Layer w1: v1(40,18.5) R2.2
  Bottom Layer w1: H1.1 15.256,14.756 cw(c17.052,12.96) 17.052,15.5 32.052,15.5 ; H2.1 30.256,14.756 cw(c32.052,12.96) 32.052,15.5 ; H3.1 49.744,14.756 ccw(c47.948,12.96) 47.951,15.5 ; H4.1 64.744,14.756 ccw(c62.948,12.96) 62.948,15.5 47.951,15.5 ; 32.052,15.5 35.948,15.5 ccw(c35.948,18.04) 37.744,16.244 v1(40,18.5) 42.256,16.244 ccw(c44.052,18.04) 44.052,15.5 47.948,15.5 ; 47.948,15.5 cw(c47.948,12.96) 47.951,15.5 ; 47.948,15.5 47.951,15.5
NetHL1_4: HL1.4 R1.2 | length 4.3
  Top Layer w0.4: R1.2 ccw(c12.293,8.707) 14,8.707 14,9.5 cw(c14.75,9.5) 14.75,10.25 HL1.4
NetHL2_4: HL2.4 R3.2 | length 4.3
  Top Layer w0.4: R3.2 ccw(c27.293,8.707) 29,8.707 29,9.5 cw(c29.75,9.5) 29.75,10.25 HL2.4
NetHL3_4: HL3.4 R4.2 | length 4.3
  Top Layer w0.4: R4.2 ccw(c49.293,8.707) 51,8.707 51,9.5 cw(c51.75,9.5) 51.75,10.25 HL3.4
NetHL4_4: HL4.4 R5.2 | length 4.3
  Top Layer w0.4: R5.2 ccw(c64.293,8.707) 66,8.707 66,9.5 cw(c66.75,9.5) 66.75,10.25 HL4.4
NetHL5_1: HL5.1 HL6.1 R8.1 | length 6.5
  Top Layer w0.4: R8.1 41,8.834 cw(c42.366,8.834) 41.4,9.8 ccw(c40.434,10.766) 41.8,10.766 HL6.1 HL5.1
NetHL5_2: HL5.2 HL6.2 R7.1 | length 6.5
  Top Layer w0.4: R7.1 40,9.276 cw(c41.024,9.276) 40.3,10 ccw(c39.576,10.724) 40.6,10.724 HL6.2 HL5.2
NetHL5_4: HL5.4 HL6.4 R6.1 | length 6.5
  Top Layer w0.4: HL5.4 HL6.4 38.2,10.766 ccw(c39.566,10.766) 38.6,9.8 cw(c37.634,8.834) 39,8.834 R6.1
T1_a0: D1.3 XP2.3 | length 7.1
  Bottom Layer w0.4: XP2.3 3.846,33.506 cw(c5.642,31.71) 5.642,34.25 D1.3
T1_a1: D1.6 XP2.4 | length 8.2
  Bottom Layer w0.4: XP2.4 6.626,27.494 ccw(c8.422,29.29) 8.422,26.75 D1.6
T1_a2: D1.7 XP2.5 | length 8.2
  Bottom Layer w0.4: XP2.5 6.586,24.994 ccw(c8.382,26.79) 8.382,24.25 D1.7
T1_a3: D1.4 XP2.6 | length 19.6
  Bottom Layer w0.4: XP2.6 5.296,23.744 ccw(c7.092,25.54) 7.092,23 10.35,23 ccw(c10.35,24.25) 11.6,24.25 11.6,26.75 ccw(c10.35,26.75) 10.35,28 10.24,28 cw(c10.24,29.34) 8.9,29.34 8.9,30.4 cw(c10.25,30.4) D1.4
T2_a0: D2.3 XP2.7 | length 32.2
  Bottom Layer w0.4: XP2.7 5.366,21.134 ccw(c7.162,22.93) 7.162,20.39 17.548,20.39 ccw(c17.548,22.93) 19.344,21.134 ; 19.356,21.146 ccw(c17.56,22.942) 20.1,22.942 20.1,28.048 cw(c22.64,28.048) 20.844,29.844 24.912,33.912 ccw(c24.574,34.25) D2.3@25.052,34.25
T2_a1: D2.6 XP2.8 | length 25.9
  Bottom Layer w0.4: XP2.8@3.626,20.334 ccw(c5.422,22.13) 5.422,19.59 17.848,19.59 ccw(c17.848,22.13) 19.644,20.334 20.056,20.746 ccw(c18.26,22.542) 20.8,22.542 20.8,22.998 cw(c23.34,22.998) 21.544,24.794 22.756,26.006 cw(c24.552,24.21) 24.552,26.75 25.052,26.75 D2.6
T2_a2: D2.7 XP2.9 | length 24.1
  Bottom Layer w0.4: XP2.9@3.626,18.046 cw(c5.422,16.25) 5.422,18.79 18.248,18.79 ccw(c18.248,21.33) 20.044,19.534 24.414,23.904 cw(c25.25,23.067) D2.7 D2.7@25.052,24.25
T2_a3: D2.4 XP2.10 | length 38.6
  Bottom Layer w0.4: XP2.10 5.366,17.246 cw(c7.162,15.45) 7.162,17.99 22.848,17.99 ccw(c22.848,20.53) 24.644,18.734 25.856,19.946 ccw(c24.06,21.742) 26.6,21.742 26.6,26.75 ccw(c25.35,26.75) 25.35,28 25.24,28 cw(c25.24,29.34) 23.9,29.34 23.9,30.4 cw(c25.25,30.4) D2.4 D2.4@25.052,31.75
T3_a0: D3.3 XP3.7 | length 43.9
  Bottom Layer w0.4: D3.3 cw(c47.25,32.9) 48.6,32.9 48.6,31.84 cw(c47.26,31.84) 47.26,30.5 47.15,30.5 ccw(c47.15,29.25) 45.9,29.25 ccw(c47.15,29.25) 47.15,28 47.948,28 cw(c47.948,25.46) 49.744,27.256 51.756,25.244 cw(c49.96,23.448) 52.5,23.448 52.5,22.942 ccw(c55.04,22.942) 53.244,21.146 ; 53.256,21.134 ccw(c55.052,22.93) 55.052,20.39 72.838,20.39 ccw(c72.838,22.93) 74.634,21.134 XP3.7
T3_a1: D3.6 XP3.8 | length 33.4
  Bottom Layer w0.4: D3.6 47.948,26.75 cw(c47.948,24.21) 49.744,26.006 50.956,24.794 cw(c49.16,22.998) 51.7,22.998 51.7,22.542 ccw(c54.24,22.542) 52.444,20.746 52.856,20.334 ccw(c54.652,22.13) 54.652,19.59 74.578,19.59 ccw(c74.578,22.13) XP3.8@76.374,20.334
T3_a2: D3.7 XP3.9 | length 31.4
  Bottom Layer w0.4: D3.7 cw(c47.25,23.067) 48.086,23.904 52.456,19.534 ccw(c54.252,21.33) 54.252,18.79 74.578,18.79 cw(c74.578,16.25) XP3.9@76.374,18.046
T3_a3: D3.4 XP3.10 | length 45.9
  Bottom Layer w0.4: D3.4 46.35,31.75 ccw(c46.35,30.5) 45.1,30.5 45.1,21.742 ccw(c47.64,21.742) 45.844,19.946 47.056,18.734 ccw(c48.852,20.53) 48.852,17.99 72.838,17.99 cw(c72.838,15.45) 74.634,17.246 XP3.10
T4_a0: D4.3 XP3.3 | length 14.6
  Bottom Layer w0.4: D4.3 65.731,34.25 cw(c65.731,32.031) 67.3,33.6 ccw(c68.749,35.049) 68.749,33 76.114,33 ccw(c76.114,33.546) XP3.3
T4_a1: D4.6 XP3.4 | length 15.6
  Bottom Layer w0.4: D4.6 62.756,27.256 cw(c64.552,25.46) 64.552,28 72.828,28 ccw(c72.828,30.54) 74.624,28.744 XP3.4
T4_a2: D4.7 XP3.5 | length 15.6
  Bottom Layer w0.4: D4.7 62.756,24.756 cw(c64.552,22.96) 64.552,25.5 72.868,25.5 ccw(c72.868,28.04) 74.664,26.244 XP3.5
T4_a3: D4.4 XP3.6 | length 25.5
  Bottom Layer w0.4: D4.4 ccw(c62.25,30.4) 60.9,30.4 60.9,24.25 ccw(c62.15,24.25) 62.15,23 72.908,23 ccw(c72.908,25.54) 74.704,23.744 XP3.6
pads on no net: H1.5 H1.10 H2.5 H2.10 H3.5 H3.10 H4.5 H4.10

## Silkscreen, mask and mechanical layers (free items; w line width, h text height)
Template:
  the board outline again, w0.2

## Text inside footprints (layer, text, board x,y; h text height)
HL5: Top Overlay "R" at 38,15.4 h1; Top Overlay "A" at 39.2,15.4 h1; Top Overlay "B" at 41.6,15.4 h1; Top Overlay "G" at 40.4,15.4 h1
HL6: Top Overlay "R" at 38,12.9 h1; Top Overlay "A" at 39.2,12.9 h1; Top Overlay "B" at 41.6,12.9 h1; Top Overlay "G" at 40.4,12.9 h1